# Altium PCB FIT_PM_Dual_Range_AFE.PcbDoc (part 5 of 17)
Units mm, origin at the board's own origin, x right, y up, seen from the top; angles counter-clockwise.
Board outline 259 x 114 mm, 8 copper layers (Top Layer, Mid-Layer 1, Mid-Layer 2, Layer 1, Layer 2, Mid-Layer 3, Mid-Layer 4, Bottom Layer), stack 1.616 mm thick; 963 components, 806 nets, 4757 pads, 2208 vias.
Unrouted connection lines stored in the file: 682.
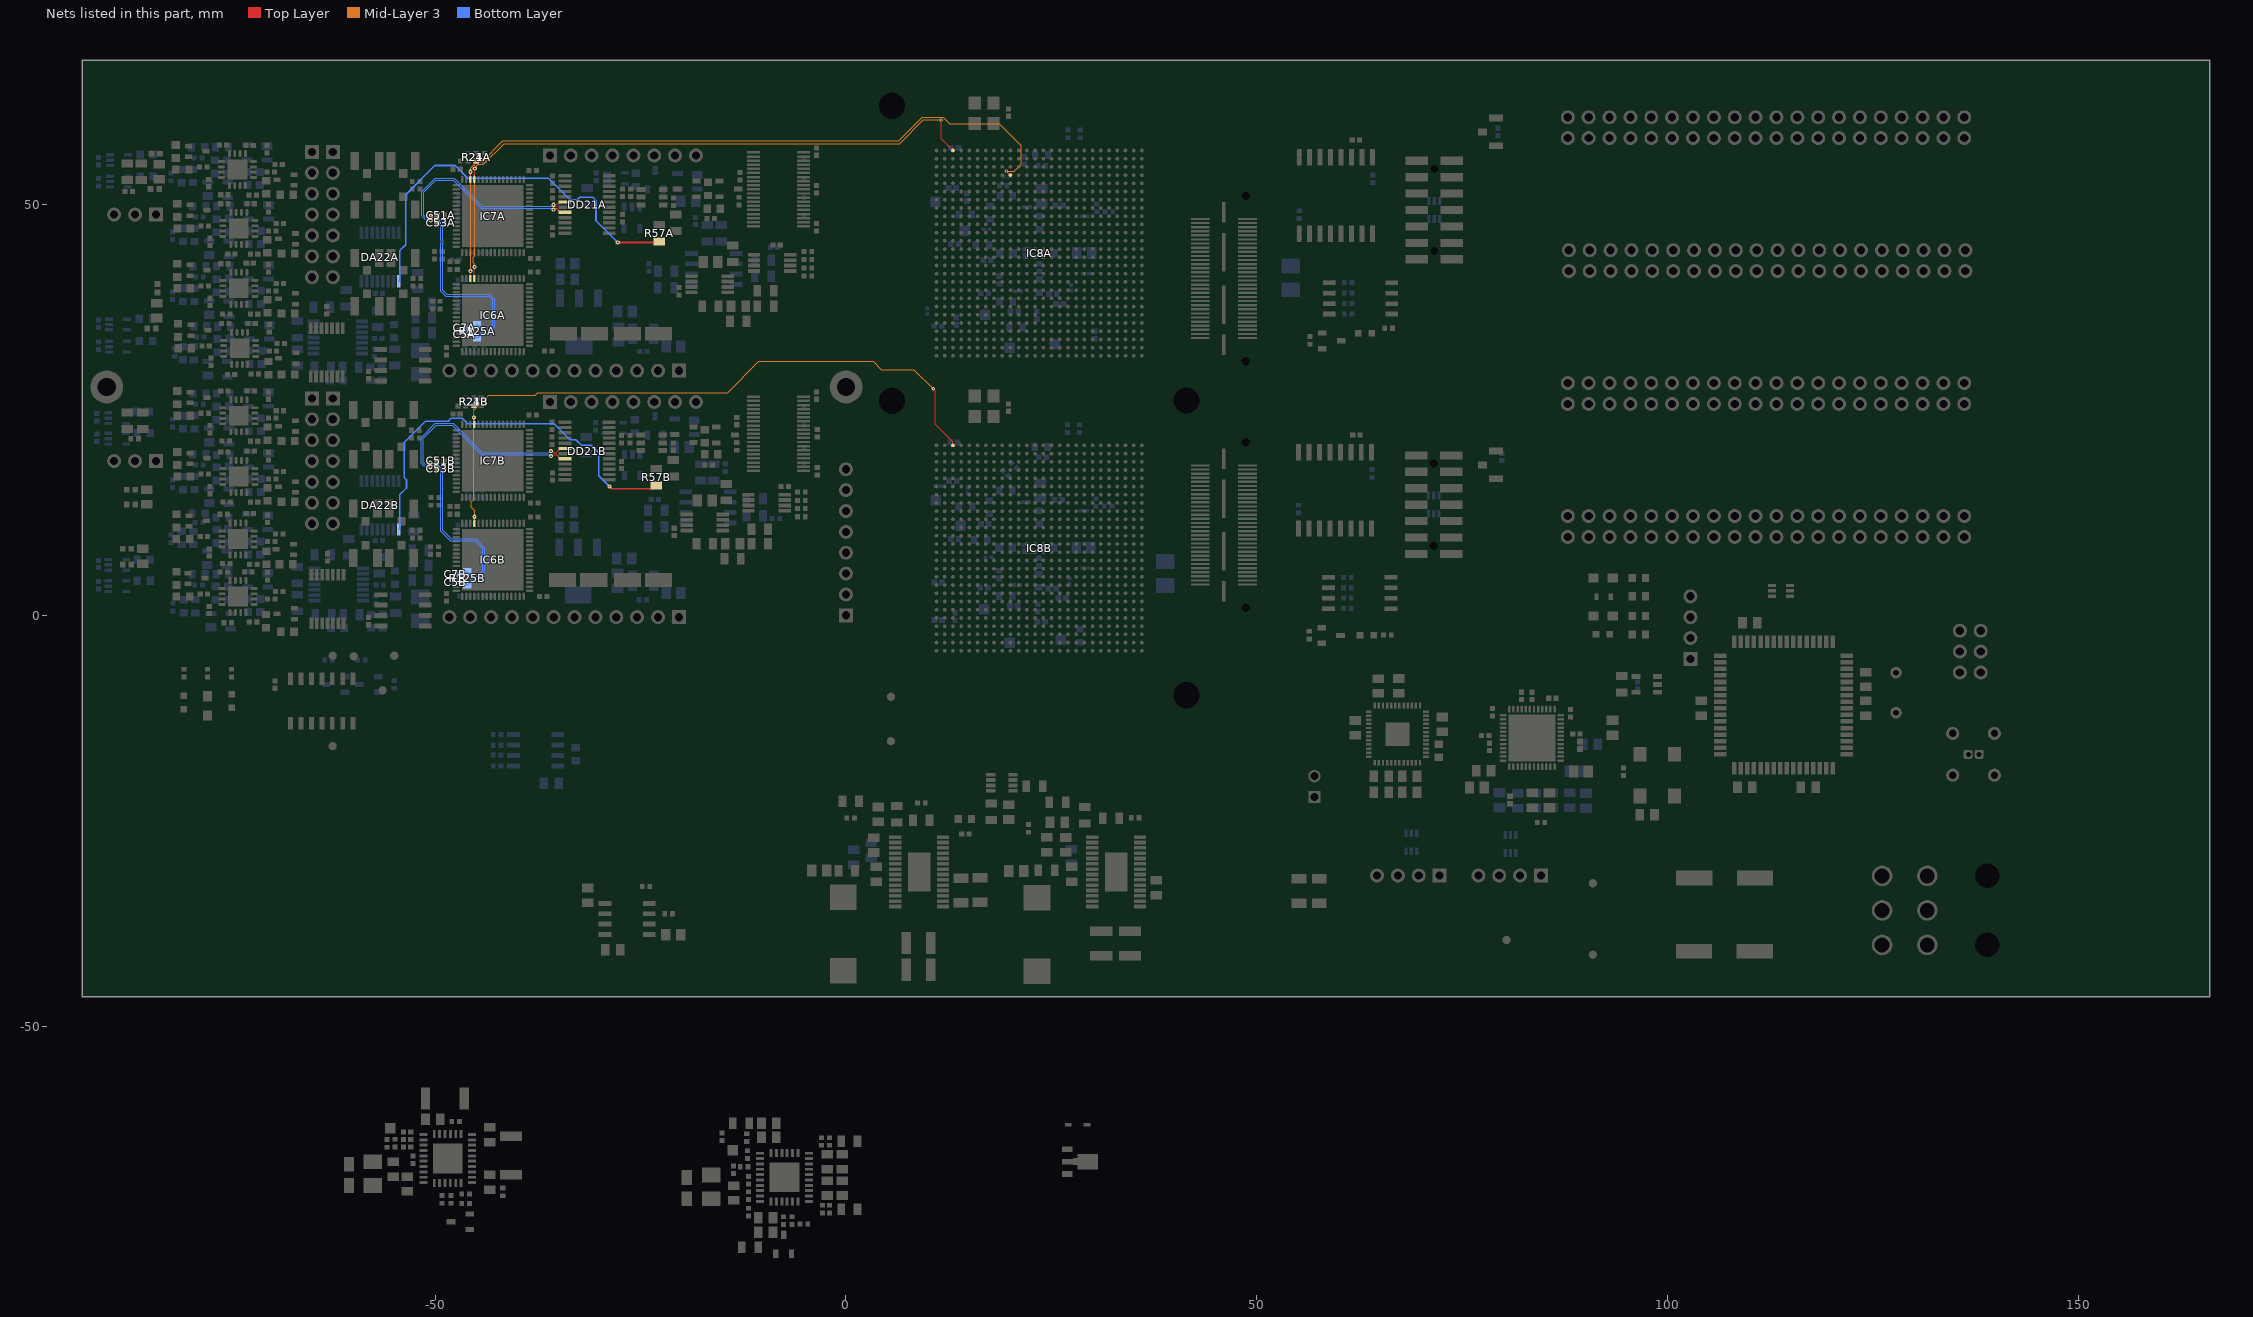
[diagram p8: the nets of this part, all layers, seen from the top]

## Part data (continued)
DD13: "Quad 2-Input AND Gate", Case=SOIC14, Manufacturer="TEXAS INSTRUMENTS", Author="CERN DEM HF", Bonding=No, Component Type=Standard, ComponentHeight=1.75mm, CreateDate=10.06.2024, Device=SN74HCT08D, HelpURL=\\cern.ch\dfs\Applications\Altium\Datasheets\SN74HCT08.pdf, LatestRevisionDate=10.06.2024, Manufacturer Part Number=SN74HCT08D, Mounted=Yes, PackageDescription="SOIC, 1.27mm Pitch; 14 Pin, 4.00mm W X 8.75mm L X 1.75mm H body, IPC Medium Density", Part Description="Quadruple 2-Input Positive-AND Gate", Part Number=SN74HCT08D, Pin Count=14, PressFit=No, Sense=No, SMD=Yes, Socket=No
DD14A DD14B DD14C DD14D DD16A DD16B DD16C DD16D DD20A DD20B: "Single 2-Input AND Gate", Case=SOT353, Manufacturer="TEXAS INSTRUMENTS", Author="CERN DEM HF", Bonding=No, Component Type=Standard, ComponentHeight=1.1mm, CreateDate=17.05.2024, Device=SN74AHCT1G08DCK, HelpURL=\\cern.ch\dfs\Applications\Altium\Datasheets\NC7SZ08.pdf, LatestRevisionDate=17.05.2024, Manufacturer Part Number=SN74AHCT1G08DCK, Mounted=Yes, PackageDescription="SOT353, SC70-5, 0.65mm Pitch; 5 Pin, 1.25mm W X 2.00mm L X 1.10mm H body, IPC Medium Density", Part Description="Single 2-Input Positive-AND Gate", Part Number=SN74AHCT1G08DCK, Pin Count=5, PressFit=No, Sense=No, SMD=Yes, Socket=No
DD15A DD15B: "3.3V/5V ECL Differential Data and Clock D Flip-Flop", Case=SOIC8, Manufacturer="ON SEMICONDUCTOR", Author="CERN DEM HF", Bonding=No, Component Type=Standard, ComponentHeight=1.75mm, CreateDate=08.05.2024, Device=MC10EP52D, HelpURL=\\cern.ch\dfs\Applications\Altium\Datasheets\MC10EP52D.pdf, LatestRevisionDate=08.05.2024, Manufacturer Part Number=MC10EP52D, Mounted=Yes, PackageDescription="SOIC 8, Pitch 1.27mm - Body 4x5mm, IPC Medium Density", Part Description="3.3V/5V ECL Differential Data and Clock D Flip-Flop", Part Number=MC10EP52D, Pin Count=8, PressFit=No, Sense=No, SMD=Yes, Socket=No
DD19: "1.8 V, 6 LVDS/12 CMOS Outputs Low Power Clock Fanout Buffer", Case=QFN48, Manufacturer="ANALOG DEVICES", Author="CERN DEM HF", Bonding=No, Component Type=Standard, ComponentHeight=0.8mm, CreateDate=24.05.2024, Device=ADCLK854BCP, HelpURL=\\cern.ch\dfs\Applications\Altium\Datasheets\ADCLK854BCP.pdf, LatestRevisionDate=24.05.2024, Manufacturer Part Number=ADCLK854BCP, Mounted=Yes, PackageDescription="QFN, 0.50mm Pitch, Square; 48 Pin, 7.00mm L X 7.00mm W X 0.80mm H body (w/Thermal Tab 2.9 x 2.9mm), IPC Medium Density", Part Description="1.8 V, 6 LVDS/12 CMOS Outputs Low Power Clock Fanout Buffer", Part Number=ADCLK854BCP, Pin Count=49, PressFit=No, Sense=No, SMD=Yes, Socket=No
DD21A DD21B: "Clock Multiplier with Delay Control and Phase Alignment", Case=SSOP24, Manufacturer="TEXAS INSTRUMENTS", Author="CERN DEM HF", Bonding=No, Component Type=Standard, ComponentHeight=1.75mm, CreateDate=07.05.2024, Device=CDCF5801ADBQ, HelpURL=\\cern.ch\dfs\Applications\Altium\Datasheets\CDCF5801A.pdf, LatestRevisionDate=07.05.2024, Manufacturer Part Number=CDCF5801ADBQ, Mounted=Yes, PackageDescription="SOP, 0.635mm Pitch; 24 Pin, 3.90mm W X 8.65mm L X 1.75mm H Body, IPC Medium Density", Part Description="Clock Multiplier with Delay Control and Phase Alignment", Part Number=CDCF5801ADBQ, Pin Count=24, PressFit=No, Sense=No, SMD=Yes, Socket=No
DD31: library part SN74LVC1G17DBVR, "Single Schmitt-Trigger Buffer", Case=SOT23-5, Manufacturer="TEXAS INSTRUMENTS", Author="CERN DEM JLC", Bonding=No, Component Type=Standard, ComponentHeight=1.45mm, CreateDate=06.11.2012, Device=SN74LVC1G17DBV, HelpURL=\\cern.ch\dfs\Applications\Altium\Datasheets\SN74LVC1G17DBVR.pdf, LatestRevisionDate=06.11.2012, Manufacturer Part Number=SN74LVC1G17DBV, Mounted=Yes, PackageDescription="SOT, 0.95mm Pitch; 5 Pin, 1.60mm W X 2.90mm L X 1.45mm H body, IPC Medium Density", Part Description="Single Schmitt-Trigger Buffer", Part Number=SN74LVC1G17DBVR, Pin Count=5, PressFit=No, Sense=No, SMD=Yes, Socket=No
HS1A HS1B: library part HSINK_WAKEFIELD_960-29-12-D-AB-0, "Heat Sink With 2 pads", Manufacturer=WAKEFIELD-VETTE, Manufacturer Part Number=960-29-12-D-AB-0, Author="CERN DEM BC", Component Type=Mechanical, ComponentHeight=12mm, CreateDate=24.07.2020, HelpURL=\\cern.ch\dfs\Applications\Altium\Datasheets\HSINK_WAKEFIELD_960-29-12-D-AB-0.pdf, LatestRevisionDate=24.07.2020, Mounted=Yes, PackageDescription="Extruded Heat Sink for PCB Mounting with Plastic Push Pin - L 30mm x W 29.5mm x H 12mm", Part Description="Extruded Heat Sink for PCB Mounting with Plastic Push Pin, Height 12mm", Part Number=HSINK_WAKEFIELD_960-29-12-D-AB-0, Pin Count=2, PressFit=No, Sense=No, SMD=No, Socket=No, Status=None
IC2: "3-Terminal Regulator 1=OUT 2=GND 3=IN", Case=SOT89, Manufacturer="ST MICROELECTRONICS", Author="CERN DEM JLC", Bonding=No, Component Type=Standard, ComponentHeight=1.6mm, CreateDate=10.10.2011, Device=L78L05ACUTR, HelpURL=\\cern.ch\dfs\Applications\Altium\Datasheets\L78L05ACUTR.pdf, LatestRevisionDate=06.12.2011, Manufacturer Part Number=L78L05ACUTR, Mounted=Yes, PackageDescription="SOT89-3, 3-Leads, Body 2.44x4.5mm", Part Description="5V 100mA Positive Voltage Regulator", Part Number=L78L05ACUTR, Pin Count=4, PressFit=No, Sense=No, SMD=Yes, Socket=No
IC3 IC4: library part MPM54304GMN-XXXX, "Quad-Output Power Module with I2C and MTP", Case=QFN32, Manufacturer="MPS (MONOLITIC  POWER SYSTEMS)", Manufacturer Part Number=MPM54304GMN-002, Author="CERN DEM BC", Bonding=No, Component Type=Standard, ComponentHeight=2.1mm, CreateDate=09.11.2020, HelpURL=\\cern.ch\dfs\Applications\Altium\Datasheets\MPM54304GMN.pdf, LatestRevisionDate=23.11.2022, Mounted=Yes, PackageDescription="MPS LGA-33 Case, 0.65mm Pitch, Rect.; 32 Pin, 7.00mm L X 7.00mm W X 2.10mm H body (w/Thermal Tab 3.55 X 3.55mm)", Part Description="4V to 16V Input, Quad-Output Power Module with I2C and MTP", Pin Count=33, PressFit=No, Sense=No, SMD=Yes, Socket=No
  IC3: Device=MPM54304GMN-0004, Part Number=MPM54304GMN-002
  IC4: Device=MPM54304GMN-0001, Part Number=MPM54304GMN-0001
IC5A IC5B: "600mA CMOS Low Dropout Linear Regulator with Enable", Case=SOT25, Manufacturer="DIODES INCORPORATED", Manufacturer Part Number=AP2112K-1.8, Author="CERN DEM JLC", Bonding=No, Component Type=Standard, ComponentHeight=1.4mm, CreateDate=13.06.2018, Device=AP2112K-1.8TRG1, HelpURL=\\cern.ch\dfs\Applications\Altium\Datasheets\AP2112K-1.8TRG1.pdf, LatestRevisionDate=27.06.2022, Mounted=Yes, PackageDescription="SOT23, 0.95mm Pitch; 5 Pin, 1.6mm W X 3.0mm L X 1.40mm H body, IPC Medium Density", Part Description="1.8V 600mA CMOS Low Dropout Linear Regulator with Enable", Part Number=AP2112K-1.8TRG1, Pin Count=5, PressFit=No, Sense=No, SMD=Yes, Socket=No
IC6A IC6B IC7A IC7B: "16-Bit, 200-MSPS Analog-to-Digital Converters", Case=QFN64, Manufacturer="TEXAS INSTRUMENTS", Author="CERN DEM HF", Bonding=No, Component Type=Standard, ComponentHeight=1mm, CreateDate=05.12.2024, Device=ADS4249IRGC, HelpURL=\\cern.ch\dfs\Applications\Altium\Datasheets\ADS4249IRGC.pdf, LatestRevisionDate=05.12.2024, Manufacturer Part Number=ADS4249IRGC, Mounted=Yes, PackageDescription="QFN, 0.50mm Pitch, Square; 64 Pin, 9.00mm L X 9.00mm W X 1.00mm H body (w/Thermal Tab 7.5 X 7.5mm), IPC Medium Density", Part Description="Dual-Channel, 14-Bit, 250-MSPS Ultralow-Power ADC", Part Number=ADS4249IRGC, Pin Count=65, PressFit=No, Sense=No, SMD=Yes, Socket=No
IC8A IC8B: "Artix UltraScale + Field Programmable Gate Array (FPGA), 676-Pin BGA, Industrial Grade", Case=BGA676, Manufacturer=AMD, Author="CERN DEM HF", Bonding=No, Component Type=Standard, ComponentHeight=3.50mm, ComponentLink1Description="Package Drawing", ComponentLink1URL=\\cern.ch\dfs\Applications\Altium\Datasheets\XCAU10P-2FFVB676I_Package.pdf, ComponentLink2Description=Pinout, ComponentLink2URL=\\cern.ch\dfs\Applications\Altium\Datasheets\XCAU10P-2FFVB676I_Pinout.pdf, CreateDate=10.02.2025, Device=XCAU10P-2FFVB676I, HelpURL=\\cern.ch\dfs\Applications\Altium\Datasheets\XCAU10P-2FFVB676I.pdf, LatestRevisionDate=10.02.2025, Manufacturer Part Number=XCAU10P-2FFVB676I, Mounted=Yes, PackageDescription="BGA, 1.00mm Pitch, Square; 672 Pin, 26 Columns X 26 Rows, Body 27.00mm X 27.00mm X 3.50mm H, IPC Medium Density", Part Description="Artix UltraScale + Field Programmable Gate Array (FPGA), 676-Pin BGA, Industrial Grade", Part Number=XCAU10P-2FFVB676I, Pin Count=676, PressFit=No, Sense=No, SMD=Yes, Socket=No
IC14A IC14B: "N-CHANNEL MOSFET WITH DIODE", Case=SOT23-3, Manufacturer="ON SEMICONDUCTOR", Author="CERN DEM JLC", Bonding=No, Component Type=Standard, ComponentHeight=1.11mm, CreateDate=23.03.2009, Device=BSS138LT1G, HelpURL=\\cern.ch\dfs\Applications\Altium\Datasheets\BSS138LT1G.pdf, LatestRevisionDate=23.03.2009, Manufacturer Part Number=BSS138LT1G, Mounted=Yes, PackageDescription="SOT23 3-Leads, Pitch 0.95mm - Body 1.4x3mm, IPC Medium Density", Part Description="50V 200mA N-Channel Enhancement Mode Field-Effect Transistor", Part Number=BSS138LT1G, Pin Count=3, PressFit=No, Sense=No, SMD=Yes, Socket=No
IC15A IC15B: library part MT25QL256ABA8ESF-0AAT, "256Mbit (32MB), 2.7V-3.6V, Multiple I/O Serial NOR Flash Memory,with Reset# & Hold#", Case=SOIC16, Manufacturer="MICRON TECHNOLOGY", Author="CERN DEM JLC", Bonding=No, Component Type=Standard, ComponentHeight=2.65mm, CreateDate=2018-11-05, Device=MT25QU256ABA8ESF-0SIT, HelpURL=\\cern.ch\dfs\Applications\Altium\Datasheets\MT25QL256ABA8ESF-0AAT.pdf, LatestRevisionDate=2018-11-05, Manufacturer Part Number=MT25QL256ABA8ESF-0AAT, Mounted=Yes, PackageDescription="SOIC, 1.27mm Pitch; 16 Pin, 7.50mm W X 10.3mm L X 2.65mm H body, IPC Medium Density", Part Description="256Mbit (32MB), 2.7V-3.6V, Multiple I/O Serial NOR Flash Memory,with Reset# & Hold# (Automotive grade AEC-Q100)", Part Number=MT25QU256ABA8ESF-0SIT, Pin Count=16, PressFit=No, Sense=No, SMD=Yes, Socket=No
J1A J1B: library part MOLEX_87832-1420, "Connector 14 Male", Manufacturer=MOLEX, Manufacturer Part Number=87832-1420, Author="CERN DEM JLC", Component Type=Standard, ComponentHeight=7.6mm, CreateDate=09/09/2008, Family=Milli-Grid™, HelpURL=\\cern.ch\dfs\Applications\Altium\Datasheets\MOLEX_87832-1420.pdf, LatestRevisionDate=09/09/2008, Mounted=Yes, Part Description="2.00mm (.079\") Pitch Milli-Grid™ Header, Surface Mount, Vertical, Shrouded, 14 Circuits, with Locking Windows and Centre Polarization Slot, PCB Locator", Part Number=MOLEX_87832-1420, Pin Count=14, PressFit=No, Sense=No, SMD=Yes, Socket=No, Status=None, Supplier=Radiospares, SupplierRef=6701071, Table=MOLEX
J2A J2B J3: library part SAMTEC_TSW-104-07-L-S-LL, "Connector 4 Male", Manufacturer=SAMTEC, Manufacturer Part Number=TSW-104-07-L-S-LL, Author="CERN DEM MR", Component Type=Standard, ComponentHeight=8.38mm, CreateDate=07.12.2016, Family="Header 4", HelpURL=\\cern.ch\dfs\Applications\Altium\Datasheets\SAMTEC_TSW-104-07-L-S-LL.pdf, LatestRevisionDate=07.12.2016, Mounted=Yes, Part Description="4 Contacts, Pitch 2.54mm, Single Row  Through Mount Straigh Header (Post Lead 5.84mm, Tail Lead 2.54mm, Insulator 2.54mm)", Part Number=SAMTEC_TSW-104-07-L-S-LL, Pin Count=4, PressFit=No, Sense=No, SMD=No, Socket=No, Status=None
J4A J4B J5A J5B J6A J6B J7A J7B J9A J9B J10A J10B J11A J11B J12A J12B: library part HIROSE_U.FL-R-SMT-1(10), Manufacturer="HIROSE (HRS)", Manufacturer Part Number=U.FL-R-SMT-1, Author="CERN DEM JLC", Component Type=Standard, ComponentHeight=1.25mm, CreateDate=24.03.2010, Family=U.FL, HelpURL=\\cern.ch\dfs\Applications\Altium\Datasheets\HIROSE_U.FL-R-SMT-1.pdf, LatestRevisionDate=29.08.2024, Mounted=Yes, Part Description="Up to 6GHz Ultra Small Surface Mount Male Coaxial Connectors U.FL Series", Part Number=HIROSE_U.FL-R-SMT-1(10), Pin Count=2, PressFit=No, Sense=No, SMD=Yes, Socket=No, Status=None
J8A J8B: library part SAMTEC_QSH-030-01-L-D-A, "Connector 60 Female + 4 GND", Manufacturer=SAMTEC, Manufacturer Part Number=QSH-030-01-L-D-A, Author="CERN DEM JLC", Component Type=Standard, ComponentHeight=3.25mm, CreateDate=07.10.2013, HelpURL=\\cern.ch\dfs\Applications\Altium\Datasheets\SAMTEC_QSH-030-01-L-D-A.pdf, LatestRevisionDate=07.10.2013, Mounted=Yes, Part Description="60 Contacts (2x30) , Pitch 0.5mm, Straight Double Row High Speed Ground Plane Socket", Part Number=SAMTEC_QSH-030-01-L-D-A, Pin Count=64, PressFit=No, Sense=No, SMD=Yes, Socket=No, Status=None
JP1: library part JUMPER, "Jumper", Manufacturer Part Number=68001-102HLF, Supplier Part Number 1=1798942, Supplier 1=Farnell
L1A L1B L2A L2B L3 L4 L5 L6: library part IND0805_TDK_MPZ2012S221A, Case=0805, Manufacturer=TDK, Manufacturer Part Number=MPZ2012S221A, Power=3A, Resistance=0.04R, Tolerance=±25%, Author="CERN DEM HF", Component Type=Standard, ComponentHeight=1.05mm, CreateDate=04.10.2021, HelpURL=\\cern.ch\dfs\Applications\Altium\Datasheets\IND0805_TDK_MPZ2012.pdf, LatestRevisionDate=04.10.2021, Mounted=Yes, Part Description="SMT Chip Bead for General Power Line (MPZ Series)", Part Number=IND0805_TDK_MPZ2012S221A, Pin Count=2, Sense=No, SMD=Yes, Socket=No
L7A L7B L8A L8B: library part IND0603_MURATA_BLM18PG121SN1D, Case=0603, Manufacturer=MURATA, Manufacturer Part Number=BLM18PG121SN1D, Power=2A, Resistance=0.05R, Author="CERN DEM BC", Component Type=Standard, ComponentHeight=0.95mm, CreateDate=27.07.2015, HelpURL=\\cern.ch\dfs\Applications\Altium\Datasheets\IND0603_MURATA_BLM18P.pdf, LatestRevisionDate=25.10.2018, Mounted=Yes, Part Description="SMD EMIFIL Chip Ferrite Bead", Part Number=IND0603_MURATA_BLM18PG121SN1D, Pin Count=2, Sense=No, SMD=Yes, Socket=No, Status=None
L9 L10: library part IND4040_10UH_20%_VISHAY_IHLP-4040DZ-01, "Inductor With Core", Case=4040, Manufacturer="VISHAY DALE", Manufacturer Part Number=IHLP4040DZER100M01, Power=6.8A, Resistance=0.0332R, Tolerance=±20%, Author="CERN DEM HF", Component Type=Standard, ComponentHeight=4mm, CreateDate=31.05.2024, HelpURL=\\cern.ch\dfs\Applications\Altium\Datasheets\IND_VISHAY_IHLP4040DZ-01.pdf, LatestRevisionDate=31.05.2024, Mounted=Yes, Part Description="IHLP® Commercial Inductor, Low DCR Series", Part Number=IND4040_10UH_20%_VISHAY_IHLP-4040DZ-01, Pin Count=2, Sense=No, SMD=Yes, Socket=No
L25A L25B L25C L25D L26A L26B L26C L26D L29A L29B L29C L29D L30A L30B L30C L30D: library part IND0603_MURATA_BLM18SG221TN1, Case=0603, Manufacturer=MURATA, Manufacturer Part Number=BLM18SG221TN1, Power=2.5A, Resistance=0.04R, Tolerance=±25%, Author="CERN DEM MR", Component Type=Standard, ComponentHeight=0.95mm, CreateDate=08.01.2016, HelpURL=\\cern.ch\dfs\Applications\Altium\Datasheets\IND0603_MURATA_BLM18S.pdf, LatestRevisionDate=25.10.2018, Mounted=Yes, Part Description="SMD EMIFIL Suppression Chip Ferrite Bead", Part Number=IND0603_MURATA_BLM18SG221TN1, Pin Count=2, Sense=No, SMD=Yes, Socket=No
LD1 LD3 LD4: library part LED_KINGBRIGHT_KPH-1608CGCK, "LED Green 1C 2A", Case=0603, Manufacturer=KINGBRIGHT, Manufacturer Part Number=KPH-1608CGCK, Author="CERN DEM JLC", Bonding=No, Color=Green, Component Type=Standard, ComponentHeight=0.65mm, CreateDate=03.07.2017, HelpURL=\\cern.ch\dfs\Applications\Altium\Datasheets\LED_KINGBRIGHT_KPH-1608CGCK.pdf, LatestRevisionDate=03.07.2017, Mounted=Yes, PackageDescription="SMT Green LED, Case 0603, Body L 1.6 x W 0.8mm H 0.65mm", Part Description="SMD Green LED, Case 1.6mmX0.8mm(0603), 0.65mm Thickness", Part Number=LED_KINGBRIGHT_KPH-1608CGCK, Pin Count=2, PressFit=No, Sense=No, SMD=Yes, Socket=No
LD2: library part "LED_OSRAM_LB Q39G", "LED Blue 1C 2A", Case=0603, Manufacturer=OSRAM, Manufacturer Part Number="LB Q39G", Author="CERN DEM HF", Bonding=No, Color=Blue, Component Type=Standard, ComponentHeight=0.35mm, CreateDate=16.08.2023, HelpURL="\\cern.ch\dfs\Applications\Altium\Datasheets\LED_OSRAM_LB Q39G.pdf", LatestRevisionDate=16.08.2023, Mounted=Yes, PackageDescription="Blue Chip LED, 2-Leads, Body 1.6x0.8mm , IPC Medium Density", Part Description="CHIPLED Blue LED (0603 Case)", Part Number="LED_OSRAM_LB Q39G", Pin Count=2, PressFit=No, Sense=No, SMD=Yes, Socket=No
LED1A LED1B: library part LED_KINGBRIGHT_KPH-1608SURCK, "LED Red 1C 2A", Manufacturer=KINGBRIGHT, Manufacturer Part Number=KPH-1608SURCK, Author="CERN DEM JLC", Bonding=No, Color=Red, Component Type=Standard, ComponentHeight=0.65mm, CreateDate=03.07.2017, HelpURL=\\cern.ch\dfs\Applications\Altium\Datasheets\LED_KINGBRIGHT_KPH-1608SURCK.pdf, LatestRevisionDate=03.07.2017, Mounted=Yes, PackageDescription="SMT Hyper Red LED, Case 0603, Body L 1.6 x W 0.8mm H 0.65mm", Part Description="SMD Hyper Red LED, Case 1.6mmX0.8mm(0603), 0.65mm Thickness", Part Number=LED_KINGBRIGHT_KPH-1608SURCK, Pin Count=2, PressFit=No, Sense=No, SMD=Yes, Socket=No
OSC1A OSC1B: library part OSC_25MHZ_ECS_ECS-3518-250-B, "Oscillator 4 pins 1=E/D 2=GND 3=OUT 4=VDD", Manufacturer=ECS, Manufacturer Part Number=ECS-3518-250-B, Author="CERN DEM JLC", Bonding=No, Component Type=Standard, ComponentHeight=1.3mm, CreateDate=14.08.2017, HelpURL=\\cern.ch\dfs\Applications\Altium\Datasheets\OSC_ECS_ECS-3518.pdf, LatestRevisionDate=14.08.2017, Mounted=Yes, PackageDescription="Oscillator, Corner Concave, 2.50mm Pitch, 4 Pin, 3.20mm L X 5.00mm W X 1.30mm H, ECS-3518 Series", Part Description="1.8V, ±50ppm, 15pF, -0 to 70°C, Surface Mount Clock Oscillator (ECS-3518/3525 Series)", Part Number=OSC_25MHZ_ECS_ECS-3518-250-B, Pin Count=4, PressFit=No, Sense=No, SMD=Yes, Socket=No
PB1A PB1B: library part PB_OMRON_B3U-1100P, "Push-Button Switch SPDT", Manufacturer=OMRON, Author="CERN DEM JLC", Component Type=Standard, ComponentHeight=1.75mm, CreateDate=16-Mar-10, Family="Push Button", HelpURL=\\cern.ch\dfs\Applications\Altium\Datasheets\PB_OMRON_B3U-1100P.pdf, LatestRevisionDate=16-Mar-10, Manufacturer Part Number=PB_OMRON_B3U-1100P, Mounted=Yes, PackageDescription="Body 1.2x3x2.5mm Ultra-Small Tactile SPST Pushbutton Switch, (with Ground Terminal), OMRON B3U Series", Part Description="3x2.5mm Ultra-Small Tactile SPST Pushbutton Switch (with Ground Terminal),Contact Rating 50mA 12VDC, B3U Series", Part Number=PB_OMRON_B3U-1100P, Pin Count=3, PressFit=No, Sense=No, SMD=Yes, Socket=No, Status=None
R1A R1B R2A R2B R3A R3B R9A R9B R118A R118B: library part R0805_510R_0.1%_0.125W_10PPM, "Resistor - 0.1%", Case=0805, Manufacturer=GENERIC, Manufacturer1 ComponentHeight=0.6mm, Manufacturer1 Example="YAGEO PHYCOMP", Manufacturer1 Part Number=RT0805BRB07510RL, Power=0.125W, Tolerance=±0.1%, Author="CERN DEM HF", Component Type=Standard, CreateDate=11.07.2022, HelpURL=\\cern.ch\dfs\Applications\Altium\Datasheets\R0805_YAGEO_RT.pdf, LatestRevisionDate=11.07.2022, Manufacturer Part Number=R0805_510R_0.1%_0.125W_10PPM, Mounted=Yes, Part Description="Thin Film Chip Resistor", Part Number=R0805_510R_0.1%_0.125W_10PPM, Pin Count=2, PressFit=No, Sense=No, SMD=Yes, Socket=No, Status="Not Recommended", TC=±10ppm
R4A R4B R5A R5B R6A R6B R7A R7B R122A R122B R124A R124B R126A R126B R128A R128B: library part R0402_5R1_1%_0.0625W_100PPM, "Resistor - 1%", Case=0402, Manufacturer=GENERIC, Manufacturer1 ComponentHeight=0.4mm, Manufacturer1 Example=VISHAY, Manufacturer1 Part Number=CRCW04025R10FK, Power=0.0625W, Tolerance=±1%, Author="CERN DEM MR", Component Type=Standard, CreateDate=22.11.2016, HelpURL="\\cern.ch\dfs\Applications\Altium\Datasheets\R0402_VISHAY_CRCW e3.pdf", LatestRevisionDate=22.11.2016, Manufacturer Part Number=R0402_5R1_1%_0.0625W_100PPM, Mounted=Yes, Part Description="General Purpose Thick Film Chip Resistor", Part Number=R0402_5R1_1%_0.0625W_100PPM, Pin Count=2, PressFit=No, Sense=No, SMD=Yes, Socket=No, Status="Not Recommended", TC=±100ppm/°C
R8A R8B R14A R14B R15A R15B R32A R32B R53A R53B R55A R55B R103 R105A R105B R109 R145A R145B: library part R0402_0R_JUMPER, "Resistor", Case=0402, Manufacturer=GENERIC, Manufacturer1 ComponentHeight=0.4mm, Manufacturer1 Example="YAGEO PHYCOMP", Manufacturer1 Part Number=232270591001L, Author="CERN DEM JLC", Component Type=Standard, HelpURL=\\cern.ch\dfs\Applications\Altium\Datasheets\R0402_Phycomp_RC0402.pdf, Manufacturer Part Number=R0402_0R_JUMPER, Mounted=Yes, Part Description="1A (0.05R Max DC Resistance) Zero Ohm Jumper", Part Number=R0402_0R_JUMPER, Pin Count=2, PressFit=No, Sense=No, SMD=Yes, Socket=No, Status="Not Recommended"
  R8A R8B R14A R14B R15A R15B R32A R32B R53A R53B R55A R55B: CreateDate=03.12.2007, LatestRevisionDate=17.10.2012
  R103 R105A R105B R109 R145A R145B: CreateDate=2007-12-03, LatestRevisionDate=2012-10-17
R10A R10B R115A R115B R116A R116B R117A R117B R119A R119B R120A R120B: library part R0805_51R_1%_0.125W_100PPM, "Resistor - 1%", Case=0805, Manufacturer=GENERIC, Manufacturer1 ComponentHeight=0.6mm, Manufacturer1 Example="NIC COMPONENT", Manufacturer1 Part Number=NRC10F51R0TRF, Power=0.125W, Tolerance=±1%, Author="CERN DEM JLC", Component Type=Standard, CreateDate=03.12.2007, HelpURL=\\cern.ch\dfs\Applications\Altium\Datasheets\R0805_NIC_NRC.pdf, LatestRevisionDate=13.03.2008, Manufacturer Part Number=R0805_51R_1%_0.125W_100PPM, Mounted=Yes, Part Description="General Purpose Thick Film Chip Resistor", Part Number=R0805_51R_1%_0.125W_100PPM, Pin Count=2, PressFit=No, Sense=No, SMD=Yes, Socket=No, Status=Preferred, TC=±100ppm/°C
R11A R11B R11C R11D R57A R57B R111: library part R0805_1K3_0.1%_0.1W_10PPM, "Resistor - 0.1%", Case=0805, Manufacturer=GENERIC, Manufacturer1 ComponentHeight=0.6mm, Manufacturer1 Example="TYCO HOLSWORTHY", Manufacturer1 Part Number=RN73C2A1K3BTG, Power=0.1W, Tolerance=±0.1%, Author="CERN DEM JLC", Component Type=Standard, CreateDate=03.12.2007, HelpURL=\\cern.ch\dfs\Applications\Altium\Datasheets\R0805_Tyco_RN73.pdf, LatestRevisionDate=13.03.2008, Manufacturer Part Number=R0805_1K3_0.1%_0.1W_10PPM, Mounted=Yes, Part Description="Thin Film Chip Resistor", Part Number=R0805_1K3_0.1%_0.1W_10PPM, Pin Count=2, PressFit=No, Sense=No, SMD=Yes, Socket=No, Status="Not Recommended", TC=±10ppm
R12A R12B R12C R12D R25A R25B R25C R25D R29A R29B R29C R29D R232A R232B R232C R232D: library part R0603_33R_1%_0.1W_100PPM, "Resistor - 1%", Case=0603, Manufacturer=GENERIC, Manufacturer1 ComponentHeight=0.55mm, Manufacturer1 Example="NIC COMPONENT", Manufacturer1 Part Number=NRC06F33R0TRF, Power=0.1W, Tolerance=±1%, Author="CERN DEM JLC", Component Type=Standard, CreateDate=03.12.2007, HelpURL=\\cern.ch\dfs\Applications\Altium\Datasheets\R0603_NIC_NRC.pdf, LatestRevisionDate=13.03.2008, Manufacturer Part Number=R0603_33R_1%_0.1W_100PPM, Mounted=Yes, Part Description="General Purpose Thick Film Chip Resistor", Part Number=R0603_33R_1%_0.1W_100PPM, Pin Count=2, PressFit=No, Sense=No, SMD=Yes, Socket=No, Status=Preferred, TC=±100ppm/°C
R13A R13B R13C R13D R19A R19B R19C R19D R33A R33B R33C R33D R38A R38B R38C R38D: library part R0603_220R_0.1%_0.1W_25PPM, "Resistor - 0.1%", Case=0603, Manufacturer=GENERIC, Manufacturer1 ComponentHeight=0.55mm, Manufacturer1 Example=PANASONIC, Manufacturer1 Part Number=ERA3AEB221V, Power=0.1W, Tolerance=±0.1%, Author="CERN DEM JLC", Component Type=Standard, CreateDate=12.01.2017, HelpURL=\\cern.ch\dfs\Applications\Altium\Datasheets\R0603_PANASONIC_ERA.pdf, LatestRevisionDate=12.01.2017, Manufacturer Part Number=R0603_220R_0.1%_0.1W_25PPM, Mounted=Yes, Part Description="Thin Film Chip Resistor", Part Number=R0603_220R_0.1%_0.1W_25PPM, Pin Count=2, PressFit=No, Sense=No, SMD=Yes, Socket=No, Status="Not Recommended", TC=±25ppm/°C
R16 R20A R20B R22A R22B R23A R23B R24A R24B R28 R40 R51A R51B R63 R64 R66 R69 R70 R78 R80 R83 R97 R99 R100 R101 R102 R114: library part R0402_1K_1%_0.0625W_100PPM, "Resistor - 1%", Case=0402, Manufacturer=GENERIC, Manufacturer1 ComponentHeight=0.4mm, Manufacturer1 Example="YAGEO PHYCOMP", Manufacturer1 Part Number=232270671002L, Power=0.0625W, Tolerance=±1%, Author="CERN DEM JLC", Component Type=Standard, CreateDate=03.12.2007, HelpURL=\\cern.ch\dfs\Applications\Altium\Datasheets\R0402_Phycomp_RC0402.pdf, LatestRevisionDate=17.10.2012, Manufacturer Part Number=R0402_1K_1%_0.0625W_100PPM, Mounted=Yes, Part Description="General Purpose Thick Film Chip Resistor", Part Number=R0402_1K_1%_0.0625W_100PPM, Pin Count=2, PressFit=No, Sense=No, SMD=Yes, Socket=No, Status="Not Recommended", TC=±100ppm/°C
R17A R17B R17C R17D R35A R35B R35C R35D R49A R49B R50A R50B R54A R54B R125A R125B R127 R146 R160 R161 R162 R245A R245B: library part R0603_100R_1%_0.1W_100PPM, "Resistor - 1%", Case=0603, Manufacturer=GENERIC, Manufacturer1 ComponentHeight=0.55mm, Manufacturer1 Example="NIC COMPONENT", Manufacturer1 Part Number=NRC06F4700TRF, Power=0.1W, Tolerance=±1%, Author="CERN DEM JLC", Component Type=Standard, CreateDate=03.12.2007, HelpURL=\\cern.ch\dfs\Applications\Altium\Datasheets\R0603_NIC_NRC.pdf, LatestRevisionDate=13.03.2008, Manufacturer Part Number=R0603_100R_1%_0.1W_100PPM, Mounted=Yes, Part Description="General Purpose Thick Film Chip Resistor", Part Number=R0603_100R_1%_0.1W_100PPM, Pin Count=2, PressFit=No, Sense=No, SMD=Yes, Socket=No, Status=Preferred, TC=±100ppm/°C
R18 R36 R45 R79 R82 R88: library part R0402_68K_1%_0.0625W_100PPM, "Resistor - 1%", Case=0402, Manufacturer=GENERIC, Manufacturer1 ComponentHeight=0.4mm, Manufacturer1 Example="YAGEO PHYCOMP", Manufacturer1 Part Number=232270676803L, Power=0.0625W, Tolerance=±1%, Author="CERN DEM JLC", Component Type=Standard, CreateDate=03.12.2007, HelpURL=\\cern.ch\dfs\Applications\Altium\Datasheets\R0402_Phycomp_RC0402.pdf, LatestRevisionDate=17.10.2012, Manufacturer Part Number=R0402_68K_1%_0.0625W_100PPM, Mounted=Yes, Part Description="General Purpose Thick Film Chip Resistor", Part Number=R0402_68K_1%_0.0625W_100PPM, Pin Count=2, PressFit=No, Sense=No, SMD=Yes, Socket=No, Status="Not Recommended", TC=±100ppm/°C
R21A R21B R26A R26B R30A R30B R233A R233B R233C R233D R235A R235B R235C R235D R238A R238B R238C R238D R240A R240B R240C R240D: library part R0402_NO-VALUE, "Resistor", Case=0402, Author="CERN DEM JLC", Component Type=Standard, CreateDate=03.12.2007, HelpURL=Undefined, LatestRevisionDate=13.03.2008, Manufacturer=Undefined, Manufacturer1 ComponentHeight=Undefined, Manufacturer1 Example=Undefined, Manufacturer1 Part Number=Undefined, Manufacturer Part Number=R0402_NO-VALUE, Mounted=No, Part Description="Reserved Footprint For a 0402 (1005) Chip Resistor", Part Number=R0402_NO-VALUE, Pin Count=2, PressFit=No, Sense=No, SMD=Yes, Socket=No, Status=None
R27 R73 R165A R165B R166A R166B R167A R167B R168A R168B: library part R0402_33R_1%_0.0625W_100PPM, "Resistor - 1%", Case=0402, Manufacturer=GENERIC, Manufacturer1 ComponentHeight=0.4mm, Manufacturer1 Example="YAGEO PHYCOMP", Manufacturer1 Part Number=232270673309L, Power=0.0625W, Tolerance=±1%, Author="CERN DEM JLC", Component Type=Standard, CreateDate=03.12.2007, HelpURL=\\cern.ch\dfs\Applications\Altium\Datasheets\R0402_Phycomp_RC0402.pdf, LatestRevisionDate=17.10.2012, Manufacturer Part Number=R0402_33R_1%_0.0625W_100PPM, Mounted=Yes, Part Description="General Purpose Thick Film Chip Resistor", Part Number=R0402_33R_1%_0.0625W_100PPM, Pin Count=2, PressFit=No, Sense=No, SMD=Yes, Socket=No, Status="Not Recommended", TC=±100ppm/°C
R31A R31B R41A R41B: library part R0805_100R_0.1%_0.1W_10PPM, "Resistor - 0.1%", Case=0805, Manufacturer=GENERIC, Manufacturer1 ComponentHeight=0.6mm, Manufacturer1 Example="TYCO HOLSWORTHY", Manufacturer1 Part Number=RN73C2A100RBTG, Power=0.1W, Tolerance=±0.1%, Author="CERN DEM JLC", Component Type=Standard, CreateDate=03.12.2007, HelpURL=\\cern.ch\dfs\Applications\Altium\Datasheets\R0805_Tyco_RN73.pdf, LatestRevisionDate=13.03.2008, Manufacturer Part Number=R0805_100R_0.1%_0.1W_10PPM, Mounted=Yes, Part Description="Thin Film Chip Resistor", Part Number=R0805_100R_0.1%_0.1W_10PPM, Pin Count=2, PressFit=No, Sense=No, SMD=Yes, Socket=No, Status="Not Recommended", TC=±10ppm
R34A R34B: library part R0805_10K_0.1%_0.1W_10PPM, "Resistor - 0.1%", Case=0805, Manufacturer=GENERIC, Manufacturer1 ComponentHeight=0.6mm, Manufacturer1 Example="TYCO HOLSWORTHY", Manufacturer1 Part Number=RN73C2A10KBTG, Power=0.1W, Tolerance=±0.1%, Author="CERN DEM JLC", Component Type=Standard, CreateDate=03.12.2007, HelpURL=\\cern.ch\dfs\Applications\Altium\Datasheets\R0805_Tyco_RN73.pdf, LatestRevisionDate=13.03.2008, Manufacturer Part Number=R0805_10K_0.1%_0.1W_10PPM, Mounted=Yes, Part Description="Thin Film Chip Resistor", Part Number=R0805_10K_0.1%_0.1W_10PPM, Pin Count=2, PressFit=No, Sense=No, SMD=Yes, Socket=No, Status="Not Recommended", TC=±10ppm
R37 R52: library part R2010_0R_JUMPER, "Resistor", Case=2010, Manufacturer=GENERIC, Manufacturer1 ComponentHeight=0.70mm, Manufacturer1 Example=VISHAY, Manufacturer1 Part Number=CRCW20100000Z0EF, Power=0.75W, Author="CERN DEM JLC", Component Type=Standard, CreateDate=26.02.2015, HelpURL="\\cern.ch\dfs\Applications\Altium\Datasheets\R2010_VISHAY_CRCW e3.pdf", LatestRevisionDate=26.02.2015, Manufacturer Part Number=R2010_0R_JUMPER, Mounted=Yes, Part Description="5A (0.02R Max DC Resistance) Zero Ohm Jumper", Part Number=R2010_0R_JUMPER, Pin Count=2, PressFit=No, Sense=No, SMD=Yes, Socket=No, Status=Preferred
R39A R39B R42A R42B R44A R44B R46A R46B R247A R247B: library part R0805_300R_0.05%_0.125W_10PPM, "Resistor - 0.05%", Case=0805, Manufacturer=GENERIC, Manufacturer1 ComponentHeight=0.5mm, Manufacturer1 Example=SUSUMU, Manufacturer1 Part Number=RG2012N-301-W, Power=0.125W, Tolerance=±0.05%, Author="CERN DEM HF", Component Type=Standard, CreateDate=24.06.2024, HelpURL=\\cern.ch\dfs\Applications\Altium\Datasheets\R0805_SUSUMU_RG.pdf, LatestRevisionDate=24.06.2024, Manufacturer Part Number=R0805_300R_0.05%_0.125W_10PPM, Mounted=Yes, Part Description="Thin Film Chip Resistor", Part Number=R0805_300R_0.05%_0.125W_10PPM, Pin Count=2, PressFit=No, Sense=No, SMD=Yes, Socket=No, Status="Not Recommended", TC=±10ppm/°C
R43 R164A R164B R169A R169B: library part R0402_2K4_1%_0.0625W_100PPM, "Resistor - 1%", Case=0402, Manufacturer=GENERIC, Manufacturer1 ComponentHeight=0.4mm, Manufacturer1 Example="YAGEO PHYCOMP", Manufacturer1 Part Number=232270672402L, Power=0.0625W, Tolerance=±1%, Author="CERN DEM JLC", Component Type=Standard, CreateDate=03.12.2007, HelpURL=\\cern.ch\dfs\Applications\Altium\Datasheets\R0402_Phycomp_RC0402.pdf, LatestRevisionDate=17.10.2012, Manufacturer Part Number=R0402_2K4_1%_0.0625W_100PPM, Mounted=Yes, Part Description="General Purpose Thick Film Chip Resistor", Part Number=R0402_2K4_1%_0.0625W_100PPM, Pin Count=2, PressFit=No, Sense=No, SMD=Yes, Socket=No, Status="Not Recommended", TC=±100ppm/°C
R45xA R45xB R122xA R122xB: library part R0805_5K1_0.1%_0.1W_25PPM, "Resistor - 0.1%", Case=0805, Manufacturer=GENERIC, Manufacturer1 ComponentHeight=0.5mm, Manufacturer1 Example="TT ELECTRONICS", Manufacturer1 Part Number=PCF0805R-5K1BT1, Power=0.1W, Tolerance=±0.1%, Author="CERN DEM JLC", Component Type=Standard, CreateDate=03.11.2010, HelpURL="\\cern.ch\dfs\Applications\Altium\Datasheets\R0805_TT ELECTRONICS_PCF.pdf", LatestRevisionDate=25.10.2018, Manufacturer Part Number=R0805_5K1_0.1%_0.1W_25PPM, Mounted=Yes, Part Description="Precision Surface Mount Resistor", Part Number=R0805_5K1_0.1%_0.1W_25PPM, Pin Count=2, PressFit=No, Sense=No, SMD=Yes, Socket=No, Status="Not Recommended", TC=±25ppm/°C
R47 R56 R58 R85 R89 R90 R94 R98: library part R0402_15K_1%_0.0625W_100PPM, "Resistor - 1%", Case=0402, Manufacturer=GENERIC, Manufacturer1 ComponentHeight=0.4mm, Manufacturer1 Example=VISHAY, Manufacturer1 Part Number=CRCW040215K0FK, Power=0.0625W, Tolerance=±1%, Author="CERN DEM JMW", Component Type=Standard, CreateDate=06.07.2015, HelpURL="\\cern.ch\dfs\Applications\Altium\Datasheets\R0402_VISHAY_CRCW e3.pdf", LatestRevisionDate=06.07.2015, Manufacturer Part Number=R0402_15K_1%_0.0625W_100PPM, Mounted=Yes, Part Description="General Purpose Thick Film Chip Resistor", Part Number=R0402_15K_1%_0.0625W_100PPM, Pin Count=2, PressFit=No, Sense=No, SMD=Yes, Socket=No, Status=Preferred, TC=±100ppm/°C
R48 R91: library part R0402_1M_1%_0.0625W_100PPM, "Resistor - 1%", Case=0402, Manufacturer=GENERIC, Manufacturer1 ComponentHeight=0.4mm, Manufacturer1 Example="YAGEO PHYCOMP", Manufacturer1 Part Number=232270671005L, Power=0.0625W, Tolerance=±1%, Author="CERN DEM JLC", Component Type=Standard, CreateDate=03.12.2007, HelpURL=\\cern.ch\dfs\Applications\Altium\Datasheets\R0402_Phycomp_RC0402.pdf, LatestRevisionDate=17.10.2012, Manufacturer Part Number=R0402_1M_1%_0.0625W_100PPM, Mounted=Yes, Part Description="General Purpose Thick Film Chip Resistor", Part Number=R0402_1M_1%_0.0625W_100PPM, Pin Count=2, PressFit=No, Sense=No, SMD=Yes, Socket=No, Status="Not Recommended", TC=±100ppm/°C
R59 R67 R246A R246B: library part R0805_5R1_1%_0.125W_100PPM, "Resistor - 1%", Case=0805, Manufacturer=GENERIC, Manufacturer1 ComponentHeight=0.6mm, Manufacturer1 Example=VISHAY, Manufacturer1 Part Number=CRCW08055R10FKEAHP, Power=0.125W, Tolerance=±1%, Author="CERN DEM HF", Component Type=Standard, CreateDate=07.06.2024, HelpURL="\\cern.ch\dfs\Applications\Altium\Datasheets\R0805_VISHAY_CRCW-HP e3.pdf", LatestRevisionDate=07.06.2024, Manufacturer Part Number=R0805_5R1_1%_0.125W_100PPM, Mounted=Yes, Part Description="Thick Film Chip Resistor", Part Number=R0805_5R1_1%_0.125W_100PPM, Pin Count=2, PressFit=No, Sense=No, SMD=Yes, Socket=No, Status=None, TC=±100ppm/°C
R60 R71: library part R0805_8K2_1%_0.125W_100PPM, "Resistor - 1%", Case=0805, Manufacturer=GENERIC, Manufacturer1 ComponentHeight=0.6mm, Manufacturer1 Example="NIC COMPONENT", Manufacturer1 Part Number=NRC10F8201TRF, Power=0.125W, Tolerance=±1%, Author="CERN DEM JLC", Component Type=Standard, CreateDate=03.12.2007, HelpURL=\\cern.ch\dfs\Applications\Altium\Datasheets\R0805_NIC_NRC.pdf, LatestRevisionDate=13.03.2008, Manufacturer Part Number=R0805_8K2_1%_0.125W_100PPM, Mounted=Yes, Part Description="General Purpose Thick Film Chip Resistor", Part Number=R0805_8K2_1%_0.125W_100PPM, Pin Count=2, PressFit=No, Sense=No, SMD=Yes, Socket=No, Status=Preferred, TC=±100ppm/°C
R61 R151: library part R0603_10K_1%_0.1W_100PPM, "Resistor - 1%", Case=0603, Manufacturer=GENERIC, Manufacturer1 ComponentHeight=0.55mm, Manufacturer1 Example="NIC COMPONENT", Manufacturer1 Part Number=NRC06F1002TRF, Power=0.1W, Tolerance=±1%, Author="CERN DEM JLC", Component Type=Standard, CreateDate=03.12.2007, HelpURL=\\cern.ch\dfs\Applications\Altium\Datasheets\R0603_NIC_NRC.pdf, LatestRevisionDate=13.03.2008, Manufacturer Part Number=R0603_10K_1%_0.1W_100PPM, Mounted=Yes, Part Description="General Purpose Thick Film Chip Resistor", Part Number=R0603_10K_1%_0.1W_100PPM, Pin Count=2, PressFit=No, Sense=No, SMD=Yes, Socket=No, Status=Preferred, TC=±100ppm/°C
R62 R68: library part R0805_110K_1%_0.125W_100PPM, "Resistor - 1%", Case=0805, Manufacturer=GENERIC, Manufacturer1 ComponentHeight=0.6mm, Manufacturer1 Example="NIC COMPONENT", Manufacturer1 Part Number=NRC10F1103TRF, Power=0.125W, Tolerance=±1%, Author="CERN DEM JLC", Component Type=Standard, CreateDate=03.12.2007, HelpURL=\\cern.ch\dfs\Applications\Altium\Datasheets\R0805_NIC_NRC.pdf, LatestRevisionDate=13.03.2008, Manufacturer Part Number=R0805_110K_1%_0.125W_100PPM, Mounted=Yes, Part Description="General Purpose Thick Film Chip Resistor", Part Number=R0805_110K_1%_0.125W_100PPM, Pin Count=2, PressFit=No, Sense=No, SMD=Yes, Socket=No, Status=Preferred, TC=±100ppm/°C
R65 R72: library part R0805_330K_1%_0.125W_100PPM, "Resistor - 1%", Case=0805, Manufacturer=GENERIC, Manufacturer1 ComponentHeight=0.6mm, Manufacturer1 Example="NIC COMPONENT", Manufacturer1 Part Number=NRC10F3303TRF, Power=0.125W, Tolerance=±1%, Author="CERN DEM JLC", Component Type=Standard, CreateDate=03.12.2007, HelpURL=\\cern.ch\dfs\Applications\Altium\Datasheets\R0805_NIC_NRC.pdf, LatestRevisionDate=13.03.2008, Manufacturer Part Number=R0805_330K_1%_0.125W_100PPM, Mounted=Yes, Part Description="General Purpose Thick Film Chip Resistor", Part Number=R0805_330K_1%_0.125W_100PPM, Pin Count=2, PressFit=No, Sense=No, SMD=Yes, Socket=No, Status=Preferred, TC=±100ppm/°C
R74A R74B R75A R75B R76A R76B R77A R77B R113 R144A R144B R147: library part R0402_330R_1%_0.0625W_100PPM, "Resistor - 1%", Case=0402, Manufacturer=GENERIC, Manufacturer1 ComponentHeight=0.4mm, Manufacturer1 Example="YAGEO PHYCOMP", Manufacturer1 Part Number=232270673301L, Power=0.0625W, Tolerance=±1%, Author="CERN DEM JLC", Component Type=Standard, HelpURL=\\cern.ch\dfs\Applications\Altium\Datasheets\R0402_Phycomp_RC0402.pdf, Manufacturer Part Number=R0402_330R_1%_0.0625W_100PPM, Mounted=Yes, Part Description="General Purpose Thick Film Chip Resistor", Part Number=R0402_330R_1%_0.0625W_100PPM, Pin Count=2, SMD=Yes, Socket=No, TC=±100ppm/°C
  R74A R74B R75A R75B R76A R76B R77A R77B R113 R147: CreateDate=03.12.2007, LatestRevisionDate=17.10.2012, PressFit=No, Sense=No, Status="Not Recommended"
  R144A R144B: CreateDate=2007-12-03, LatestRevisionDate=2012-10-17, Status="Not recommended", Table="Resistors SMD"
R81A R81B: library part R0805_18K_0.1%_0.125W_10PPM, "Resistor - 0.1%", Case=0805, Manufacturer=GENERIC, Manufacturer1 ComponentHeight=0.6mm, Manufacturer1 Example=PANASONIC, Manufacturer1 Part Number=ERA6ARB183V, Power=0.125W, Tolerance=±0.1%, Author="CERN DEM HF", Component Type=Standard, CreateDate=17.05.2024, HelpURL=\\cern.ch\dfs\Applications\Altium\Datasheets\R0805_PANASONIC_ERA.pdf, LatestRevisionDate=17.05.2024, Manufacturer Part Number=R0805_18K_0.1%_0.125W_10PPM, Mounted=Yes, Part Description="Thin Film Chip Resistor", Part Number=R0805_18K_0.1%_0.125W_10PPM, Pin Count=2, PressFit=No, Sense=No, SMD=Yes, Socket=No, Status="Not Recommended", TC=±10ppm
R84 R87 R92 R95: library part R0805_0R_JUMPER, "Resistor", Case=0805, Manufacturer=GENERIC, Manufacturer1 ComponentHeight=0.6mm, Manufacturer1 Example="NIC COMPONENT", Manufacturer1 Part Number=NRC10Z0, Author="CERN DEM JLC", Component Type=Standard, CreateDate=03.12.2007, HelpURL=\\cern.ch\dfs\Applications\Altium\Datasheets\R0805_NIC_NRC.pdf, LatestRevisionDate=13.03.2008, Manufacturer Part Number=R0805_0R_JUMPER, Mounted=Yes, Part Description="2A (0.05R Max DC Resistance) Zero Ohm Jumper", Part Number=R0805_0R_JUMPER, Pin Count=2, PressFit=No, Sense=No, SMD=Yes, Socket=No, Status=Preferred
R86 R96: library part R0402_7K5_1%_0.0625W_100PPM, "Resistor - 1%", Case=0402, Manufacturer=GENERIC, Manufacturer1 ComponentHeight=0.4mm, Manufacturer1 Example="YAGEO PHYCOMP", Manufacturer1 Part Number=232270677502L, Power=0.0625W, Tolerance=±1%, Author="CERN DEM JLC", Component Type=Standard, CreateDate=03.12.2007, HelpURL=\\cern.ch\dfs\Applications\Altium\Datasheets\R0402_Phycomp_RC0402.pdf, LatestRevisionDate=17.10.2012, Manufacturer Part Number=R0402_7K5_1%_0.0625W_100PPM, Mounted=Yes, Part Description="General Purpose Thick Film Chip Resistor", Part Number=R0402_7K5_1%_0.0625W_100PPM, Pin Count=2, PressFit=No, Sense=No, SMD=Yes, Socket=No, Status="Not Recommended", TC=±100ppm/°C
R93: library part R0402_80K6_1%_0.0625W_100PPM, "Resistor - 1%", Case=0402, Manufacturer=GENERIC, Manufacturer1 ComponentHeight=0.4mm, Manufacturer1 Example=VISHAY, Manufacturer1 Part Number=CRCW040280K6FK, Power=0.0625W, Tolerance=±1%, Author="CERN DEM HF", Component Type=Standard, CreateDate=25.11.2024, HelpURL=\\cern.ch\dfs\Applications\Altium\Datasheets\R0402_VISHAY_CRCW.pdf, LatestRevisionDate=25.11.2024, Manufacturer Part Number=R0402_80K6_1%_0.0625W_100PPM, Mounted=Yes, Part Description="General Purpose Thick Film Chip Resistor", Part Number=R0402_80K6_1%_0.0625W_100PPM, Pin Count=2, PressFit=No, Sense=No, SMD=Yes, Socket=No, Status=None, TC=±100ppm/°C
R104A R104B R148A R148B R149A R149B R150A R150B: library part R0402_1k_1%_0.0625W_100PPM, "Resistor - 1%", Case=0402, Manufacturer=GENERIC, Manufacturer1 ComponentHeight=0.4mm, Manufacturer1 Example="YAGEO PHYCOMP", Manufacturer1 Part Number=232270671002L, Manufacturer Part Number=R0402_1K_1%_0.0625W_100PPM, Power=0.0625W, Tolerance=±1%, Author="CERN DEM JLC", Component Type=Standard, CreateDate=2007-12-03, HelpURL=\\cern.ch\dfs\Applications\Altium\Datasheets\R0402_Phycomp_RC0402.pdf, LatestRevisionDate=2012-10-17, Mounted=Yes, Part Description="General Purpose Thick Film Chip Resistor", Part Number=R0402_1K_1%_0.0625W_100PPM, Pin Count=2, PressFit=No, Sense=No, SMD=Yes, Socket=No, Status="Not Recommended", TC=±100ppm/°C
R106A R106B R107A R107B R108A R108B R129A R129B R156A R156B R157A R157B R158A R158B R159A R159B: library part R0402_4K7_1%_0.0625W_100PPM, "Resistor - 1%", Case=0402, Manufacturer=GENERIC, Manufacturer1 ComponentHeight=0.4mm, Manufacturer1 Example="YAGEO PHYCOMP", Manufacturer1 Part Number=232270674702L, Power=0.0625W, Tolerance=±1%, Author="CERN DEM JLC", Component Type=Standard, HelpURL=\\cern.ch\dfs\Applications\Altium\Datasheets\R0402_Phycomp_RC0402.pdf, Manufacturer Part Number=R0402_4K7_1%_0.0625W_100PPM, Mounted=Yes, Part Description="General Purpose Thick Film Chip Resistor", Part Number=R0402_4K7_1%_0.0625W_100PPM, Pin Count=2, PressFit=No, Sense=No, SMD=Yes, Socket=No, Status="Not Recommended", TC=±100ppm/°C
  R106A R106B R156A R156B R157A R157B R158A R158B R159A R159B: CreateDate=03/12/2007, LatestRevisionDate=17/10/2012
  R107A R107B R108A R108B R129A R129B: CreateDate=03.12.2007, LatestRevisionDate=17.10.2012
R110: library part R0805_30K_1%_0.125W_100PPM, "Resistor - 1%", Case=0805, Manufacturer=GENERIC, Manufacturer1 ComponentHeight=0.6mm, Manufacturer1 Example="NIC COMPONENT", Manufacturer1 Part Number=NRC10F3002TRF, Power=0.125W, Tolerance=±1%, Author="CERN DEM JLC", Component Type=Standard, CreateDate=03.12.2007, HelpURL=\\cern.ch\dfs\Applications\Altium\Datasheets\R0805_NIC_NRC.pdf, LatestRevisionDate=13.03.2008, Manufacturer Part Number=R0805_30K_1%_0.125W_100PPM, Mounted=Yes, Part Description="General Purpose Thick Film Chip Resistor", Part Number=R0805_30K_1%_0.125W_100PPM, Pin Count=2, PressFit=No, Sense=No, SMD=Yes, Socket=No, Status=Preferred, TC=±100ppm/°C
R121xA R121xB: library part R0805_4K7_1%_0.125W_100PPM, "Resistor - 1%", Case=0805, Manufacturer=GENERIC, Manufacturer1 ComponentHeight=0.6mm, Manufacturer1 Example="NIC COMPONENT", Manufacturer1 Part Number=NRC10F4701TRF, Power=0.125W, Tolerance=±1%, Author="CERN DEM JLC", Component Type=Standard, CreateDate=03.12.2007, HelpURL=\\cern.ch\dfs\Applications\Altium\Datasheets\R0805_NIC_NRC.pdf, LatestRevisionDate=13.03.2008, Manufacturer Part Number=R0805_4K7_1%_0.125W_100PPM, Mounted=Yes, Part Description="General Purpose Thick Film Chip Resistor", Part Number=R0805_4K7_1%_0.125W_100PPM, Pin Count=2, PressFit=No, Sense=No, SMD=Yes, Socket=No, Status=Preferred, TC=±100ppm/°C
R123A R123B: library part R0805_10R_0.1%_0.1W_10PPM, "Resistor - 0.1%", Case=0805, Manufacturer=GENERIC, Manufacturer1 ComponentHeight=0.6mm, Manufacturer1 Example="TYCO HOLSWORTHY", Manufacturer1 Part Number=RN73C2A10RBTG, Power=0.1W, Tolerance=±0.1%, Author="CERN DEM JLC", Component Type=Standard, CreateDate=03.12.2007, HelpURL=\\cern.ch\dfs\Applications\Altium\Datasheets\R0805_Tyco_RN73.pdf, LatestRevisionDate=13.03.2008, Manufacturer Part Number=R0805_10R_0.1%_0.1W_10PPM, Mounted=Yes, Part Description="Thin Film Chip Resistor", Part Number=R0805_10R_0.1%_0.1W_10PPM, Pin Count=2, PressFit=No, Sense=No, SMD=Yes, Socket=No, Status="Not Recommended", TC=±10ppm
R130A R130B R131A R131B: library part R0402_4k7_1%_0.0625W_100PPM, "Resistor - 1%", Case=0402, Manufacturer=GENERIC, Manufacturer1 ComponentHeight=0.4mm, Manufacturer1 Example="YAGEO PHYCOMP", Manufacturer1 Part Number=232270674702L, Manufacturer Part Number=R0402_4K7_1%_0.0625W_100PPM, Power=0.0625W, Tolerance=±1%, Author="CERN DEM JLC", Component Type=Standard, CreateDate=2007-12-03, HelpURL=\\cern.ch\dfs\Applications\Altium\Datasheets\R0402_Phycomp_RC0402.pdf, LatestRevisionDate=2012-10-17, Mounted=Yes, Part Description="General Purpose Thick Film Chip Resistor", Part Number=R0402_4K7_1%_0.0625W_100PPM, Pin Count=2, PressFit=No, Sense=No, SMD=Yes, Socket=No, Status="Not Recommended", TC=±100ppm/°C
R152A R152B R153A R153B R154A R154B R155A R155B: library part R0402_100R_1%_0.0625W_100PPM, "Resistor - 1%", Case=0402, Manufacturer=GENERIC, Manufacturer1 ComponentHeight=0.4mm, Manufacturer1 Example="YAGEO PHYCOMP", Manufacturer1 Part Number=232270671001L, Power=0.0625W, Tolerance=±1%, Author="CERN DEM JLC", Component Type=Standard, CreateDate=03-Dec-07, HelpURL=\\cern.ch\dfs\Applications\Altium\Datasheets\R0402_Phycomp_RC0402.pdf, LatestRevisionDate=17-Oct-12, Manufacturer Part Number=R0402_100R_1%_0.0625W_100PPM, Mounted=Yes, Part Description="General Purpose Thick Film Chip Resistor", Part Number=R0402_100R_1%_0.0625W_100PPM, Pin Count=2, PressFit=No, Sense=No, SMD=Yes, Socket=No, Status="Not Recommended", TC=±100ppm/°C
R163: library part R0805_20R_1%_0.125W_100PPM, "Resistor - 1%", Case=0805, Manufacturer=GENERIC, Manufacturer1 ComponentHeight=0.6mm, Manufacturer1 Example="NIC COMPONENT", Manufacturer1 Part Number=NRC10F20R0TRF, Power=0.125W, Tolerance=±1%, Author="CERN DEM JLC", Component Type=Standard, CreateDate=03.12.2007, HelpURL=\\cern.ch\dfs\Applications\Altium\Datasheets\R0805_NIC_NRC.pdf, LatestRevisionDate=13.03.2008, Manufacturer Part Number=R0805_20R_1%_0.125W_100PPM, Mounted=Yes, Part Description="General Purpose Thick Film Chip Resistor", Part Number=R0805_20R_1%_0.125W_100PPM, Pin Count=2, PressFit=No, Sense=No, SMD=Yes, Socket=No, Status=Preferred, TC=±100ppm/°C
R234A R234B R234C R234D R236A R236B R236C R236D R237A R237B R237C R237D R239A R239B R239C R239D: library part R0603_210R_0.1%_0.063W_10PPM, "Resistor - 0.1%", Case=0603, Manufacturer=GENERIC, Manufacturer1 ComponentHeight=0.5mm, Manufacturer1 Example="TYCO HOLSWORTHY", Manufacturer1 Part Number=RN73C1J210RBTDF, Power=0.063W, Tolerance=±0.1%, Author="CERN DEM JLC", Component Type=Standard, CreateDate=03.12.2007, HelpURL=\\cern.ch\dfs\Applications\Altium\Datasheets\R0603_Tyco_RN73.pdf, LatestRevisionDate=13.03.2008, Manufacturer Part Number=R0603_210R_0.1%_0.063W_10PPM, Mounted=Yes, Part Description="Thin Film Chip Resistor", Part Number=R0603_210R_0.1%_0.063W_10PPM, Pin Count=2, PressFit=No, Sense=No, SMD=Yes, Socket=No, Status="Not Recommended", TC=±10ppm
R248A R248B: library part "R0603_3K_1%_0.33W_100PPM_VISHAY_CRCW-HP e3", "Resistor - 1%", Case=0603, Manufacturer="VISHAY DRALORIC", Manufacturer Part Number=CRCW06033K00FKEAHP, Power=0.33W, Tolerance=±1%, Voltage=75V, Author="CERN DEM BC", Component Type=Standard, ComponentHeight=0.55mm, CreateDate=01.03.2021, HelpURL="\\cern.ch\dfs\Applications\Altium\Datasheets\R0603_VISHAY_CRCW-HP e3.pdf", LatestRevisionDate=01.03.2021, Mounted=Yes, Part Description="Pulse Proof, High Power Thick Film Chip Resistor", Part Number="R0603_3K_1%_0.33W_100PPM_VISHAY_CRCW-HP e3", Pin Count=2, PressFit=No, Sense=No, SMD=Yes, Socket=No, Status=None, TC=±100ppm/°C
R300A R300B R300C R300D R400A R400B R400C R400D: library part R0402_100R_0.1%_1W_25PPM_VISHAY_FCHP0402E1000BS, "Resistor - 0.1%", Case=0402, Manufacturer=VISHAY, Manufacturer Part Number=FCHP0402E1000BS, Power=1W, Tolerance=±0.1%, Author="CERN DEM HF", Component Type=Standard, ComponentHeight=0.38mm, CreateDate=04.04.2023, HelpURL=\\cern.ch\dfs\Applications\Altium\Datasheets\R0402_VISHAY_FCHP.pdf, LatestRevisionDate=04.04.2023, Mounted=Yes, Part Description="High Frequency 60 GHz High Power 1 W Thin Film Surface Mount Chip Resistor", Part Number=R0402_100R_0.1%_1W_25PPM_VISHAY_FCHP0402E1000BS, Pin Count=2, PressFit=No, Sense=No, SMD=Yes, Socket=No, Status="Not Recommended", TC=±25ppm/°C
SW1A SW1B: library part SW_TYCO_1571983-4, "4 Ways SPST DIP Switch", Manufacturer=TYCO, Manufacturer Part Number="1571983-4 or GDH04S04", Author="CERN DEM JLC", Component Type=Standard, ComponentHeight=2.31mm, CreateDate=08-Jan-09, Family=Switch, HelpURL=\\cern.ch\dfs\Applications\Altium\Datasheets\SW_TYCO_1571983-4.pdf, LatestRevisionDate=08-Jan-09, Mounted=Yes, PackageDescription="Pitch 1.27mm,  Body 6.2x6.2mm, 4 Ways SPST Surface-Mount DIP Switch, TYCO GDH Series", Part Description="4 Way SPST SMD DIP Switch, Latched, Contact Rating 0.025A 24VDC", Part Number=SW_TYCO_1571983-4, Pin Count=8, PressFit=No, Sense=No, SMD=Yes, Socket=No, Status=None
T1 T2: "N-CHANNEL MOSFET WITH DIODE", Case=SOT23-3, Manufacturer="ON SEMICONDUCTOR", Manufacturer Part Number=BSS138L, Author="CERN DEM JLC", Bonding=No, Component Type=Standard, ComponentHeight=1.11mm, CreateDate=23.03.2009, Device=BSS138LT1G, HelpURL=\\cern.ch\dfs\Applications\Altium\Datasheets\BSS138LT1G.pdf, LatestRevisionDate=25.05.2022, Mounted=Yes, PackageDescription="SOT23, 0.95mm Pitch; 3 Pin, 1.40mm W X 3.00mm L X 1.10mm H body, IPC Medium Density", Part Description="50V, 200mA N-Channel Enhancement Mode Field-Effect Transistor", Part Number=BSS138LT1G, Pin Count=3, PressFit=No, Sense=No, SMD=Yes, Socket=No
TP1 TP2A TP2B TP3A TP3B TP4A TP4B TP5A TP5B TP6A TP6B TP8: library part SMD_PAD_1.27X1.27MM, Author="CERN DEM JLC", Component Type="Standard (No BOM)", ComponentHeight=0mm, CreateDate=12.01.2008, Family="Test Point", HelpURL=Undefined, LatestRevisionDate=12.01.2008, Mounted=No, PackageDescription="1.27mm x 1.27mm PCB Copper Area (SMD Test Point)", Part Description="1.27mm x 1.27mm PCB Copper Area (SMD Test Point)", Part Number=SMD_PAD_1.27X1.27MM, Pin Count=1, Sense=No, SMD=Yes, Socket=No, Status=None
TP7A TP7B TP9A TP9B TP10A TP10B TP11A TP11B: library part SMD_PAD_D0.6MM, "Test Point", Author="CERN DEM HF", Component Type="Standard (No BOM)", ComponentHeight=0mm, CreateDate=22.11.2023, Family="SMD Pad", HelpURL=Undefined, LatestRevisionDate=22.11.2023, Mounted=No, PackageDescription="0.6mm Diameter SMD Pad", Part Description="0.6mm Diameter SMD Pad", Part Number=SMD_PAD_D0.6MM, Pin Count=1, Sense=No, SMD=Yes, Socket=No, Status=None